# Altium PCB PCB_Indication.PcbDoc
Units mm, origin at the board's own origin, x right, y up, seen from the top; angles counter-clockwise.
Board outline 30 x 20 mm, 2 copper layers (Top Layer, Bottom Layer); 18 components, 60 nets, 63 pads, 0 vias.
Unrouted connection lines stored in the file: 5.
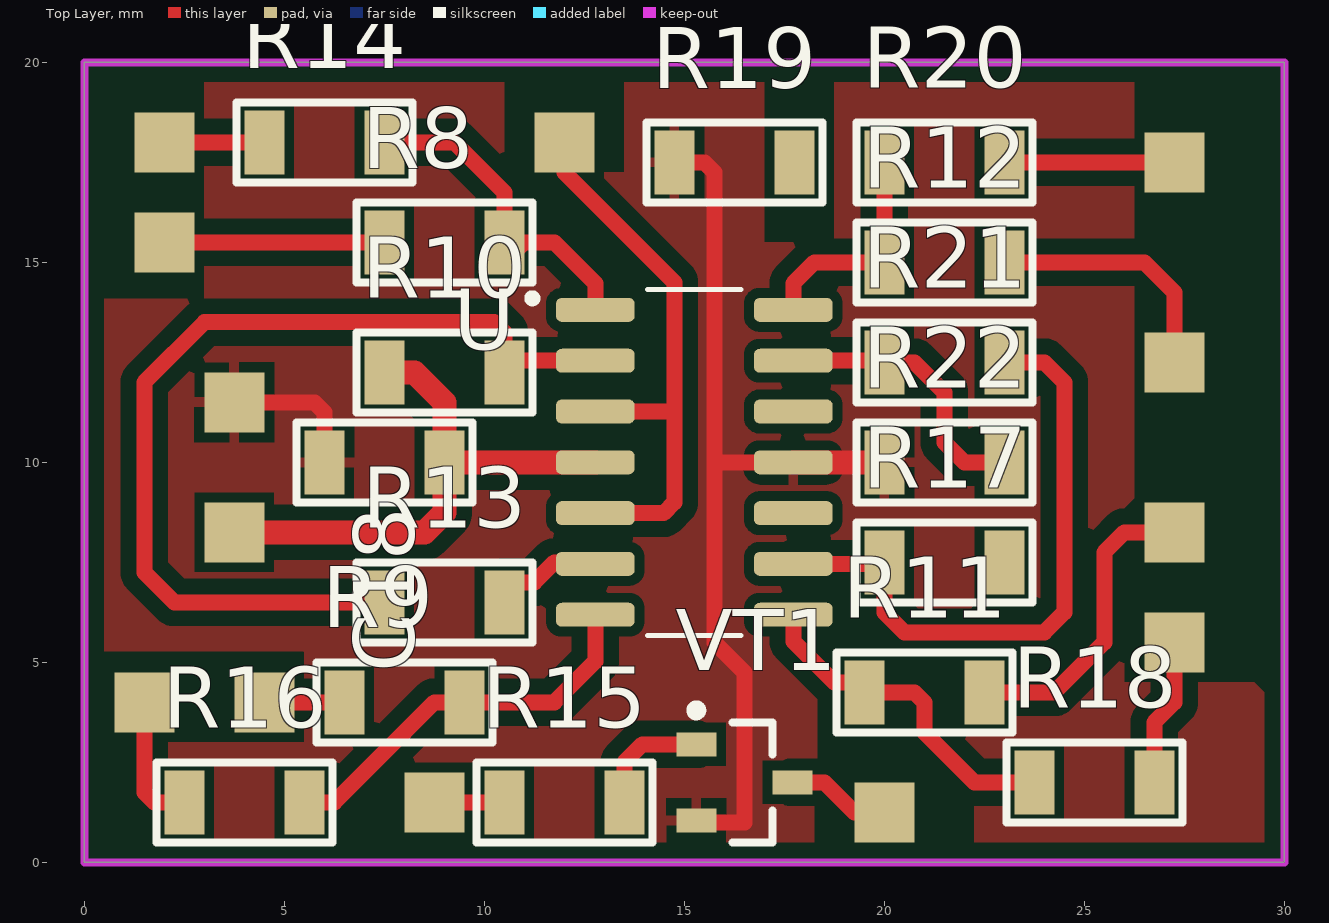
[diagram p0: Top Layer view]
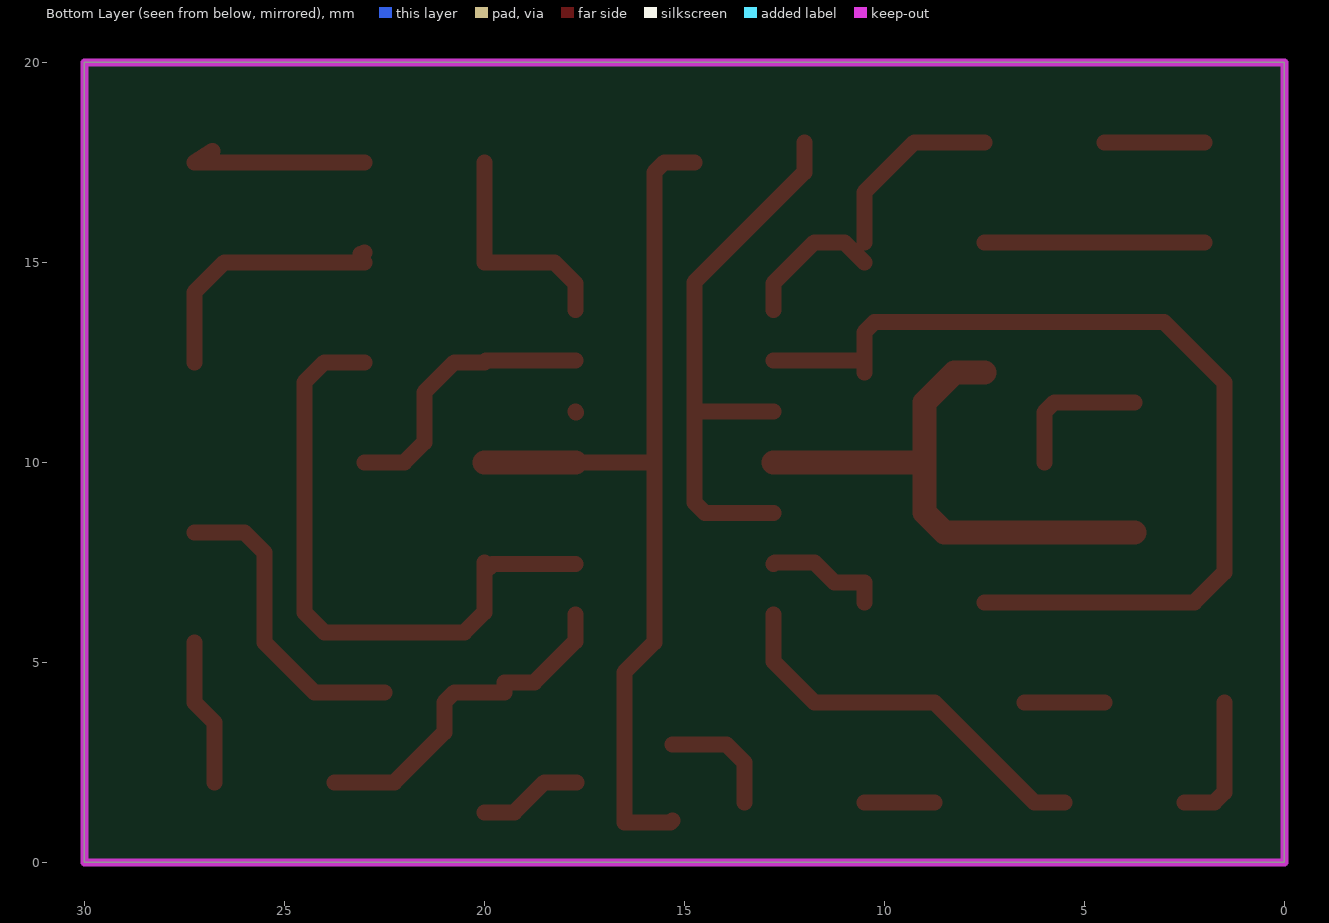
[diagram p1: Bottom Layer view, seen from below]
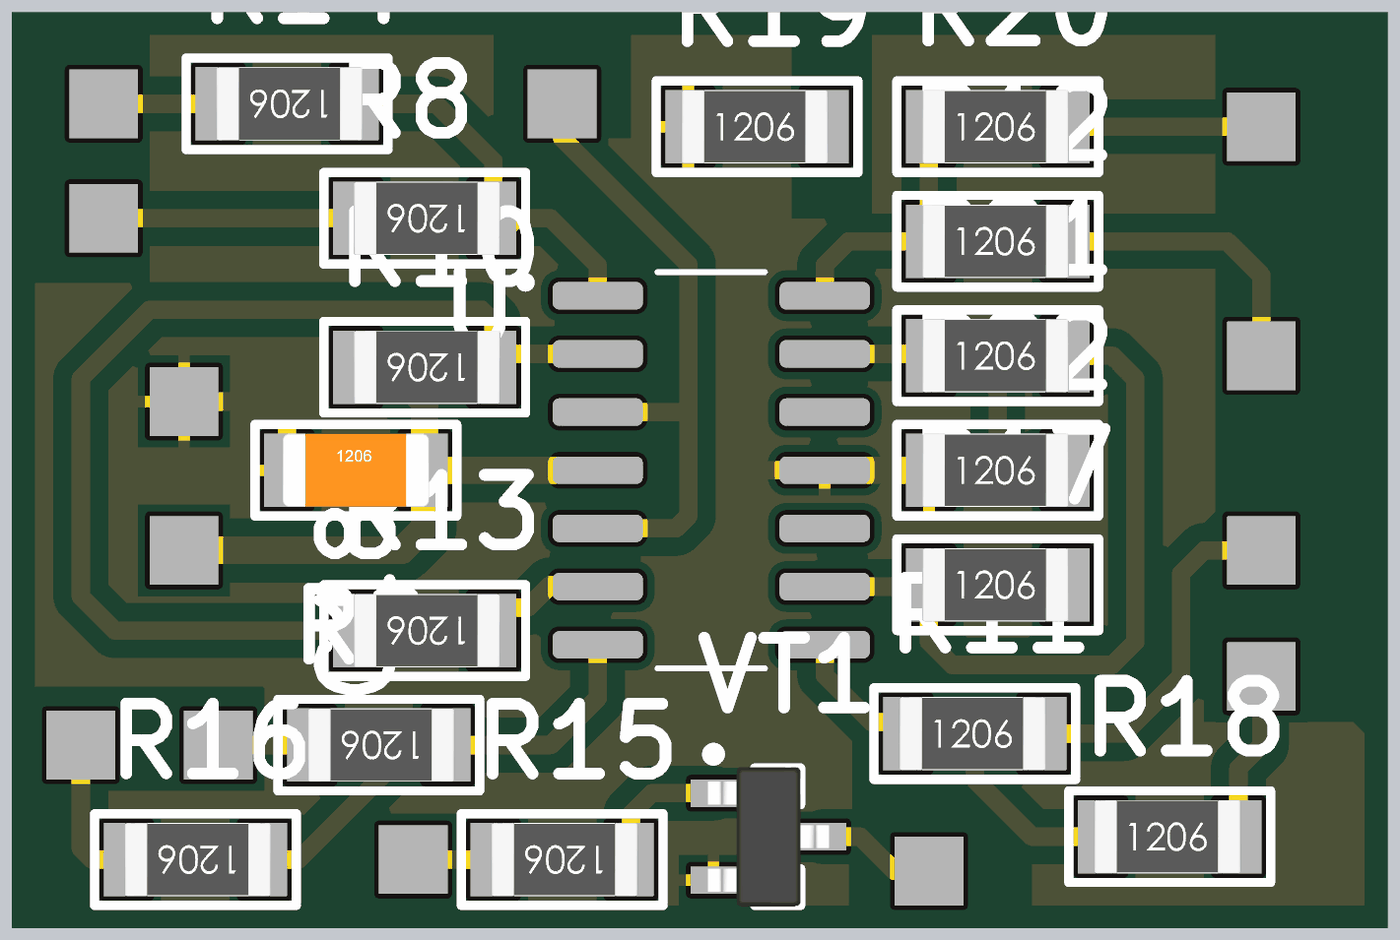
[diagram p2: 3D render of the assembled board from above, using the file's embedded part models]

## Layer stack, top to bottom
Top Solder: solder mask 0.0102, Solder Resist, Dk 3.5
Top Layer: signal copper 0.0356
Dielectric 1: dielectric 0.32, FR-4, Dk 4.8
Bottom Layer: signal copper 0.0356
Bottom Solder: solder mask 0.0102, Solder Resist, Dk 3.5

## Board outline
0,0 0,20 30,20 30,0

## Design rules (kind name [scope] priority, off if disabled: settings)
Clearance [All] p1: gap=0.254 ignorepadtopadclearanceinfootprint=TRUE except(0: Arc-Hole Track-Hole SMDPad-Hole THPad-Hole Via-Hole Fill-Hole Poly-Hole Region-Hole Text-Hole; 0.4: Arc-Fill Arc-Poly Arc-Region Track-Fill Track-Poly Track-Region)
PolygonConnect [All] p1: connectstyle=Relief reliefconductorwidth=0.254 reliefentries=4 polygonreliefangle="90 Angle" airgapwidth=0.254
RoutingVias [All] p1: holewidth=0.711 width=1.27 viastyle="Through Hole" minholewidth=0.711 minwidth=1.27 maxholewidth=0.711 maxwidth=1.27
SolderMaskExpansion [All] p1: expansion=0.102
Width [All] p1: maxlimit=0.8 minlimit=0.254 preferedwidth=0.4
30 further rules are at their usual default settings.

## Classes and differential pairs
component class SchemeP1: U5 U6 U12

## Components (designator, comment, footprint, x,y, rotation, side; value= is the part's Value field where it differs from the comment)
C18 "Ceramic capacitor, 0.1μF, X7R, ±10%, 50V, 1206, -55...+125°C" "CAP: 1206" 7.5,10 r0 top value=0.1?F
R8 "Resistor film, 3k, ±5%, 1206, 0.25W, -55...+125°C" "RES: 1206" 9,15.5 r180 top value=3k
R9 "Resistor film, 3k, ±5%, 1206, 0.25W, -55...+125°C" "RES: 1206" 8,4 r180 top value=3k
R10 "Resistor film, 10k, ±5%, 1206, 0.25W, -55...+125°C" "RES: 1206" 9,12.25 r180 top value=10k
R11 "Resistor film, 3k, ±5%, 1206, 0.25W, -55...+125°C" "RES: 1206" 21,4.25 r0 top value=3k
R12 "Resistor film, 3k, ±5%, 1206, 0.25W, -55...+125°C" "RES: 1206" 21.5,15 r0 top value=3k
R13 "Resistor film, 10k, ±5%, 1206, 0.25W, -55...+125°C" "RES: 1206" 9,6.5 r180 top value=10k
R14 "Resistor film, 3k, ±5%, 1206, 0.25W, -55...+125°C" "RES: 1206" 6,18 r180 top value=3k
R15 "Resistor film, 1k, ±5%, 1206, 0.25W, -55...+125°C" "RES: 1206" 12,1.5 r180 top value=1k
R16 "Resistor film, 3k, ±5%, 1206, 0.25W, -55...+125°C" "RES: 1206" 4,1.5 r180 top value=3k
R17 "Resistor film, 10k, ±5%, 1206, 0.25W, -55...+125°C" "RES: 1206" 21.5,7.5 r0 top value=10k
R18 "Resistor film, 3k, ±5%, 1206, 0.25W, -55...+125°C" "RES: 1206" 25.25,2 r0 top value=3k
R19 "Resistor film, 10k, ±5%, 1206, 0.25W, -55...+125°C" "RES: 1206" 16.25,17.5 r0 top value=10k
R20 "Resistor film, 3k, ±5%, 1206, 0.25W, -55...+125°C" "RES: 1206" 21.5,17.5 r0 top value=3k
R21 "Resistor film, 10k, ±5%, 1206, 0.25W, -55...+125°C" "RES: 1206" 21.5,12.5 r0 top value=10k
R22 "Resistor film, 10k, ±5%, 1206, 0.25W, -55...+125°C" "RES: 1206" 21.5,10 r0 top value=10k
U "LM324DR" SOIC127P600X175-14N 15.25,10 r0 top
VT1 "*" SOT23_123 16.5,2 r0 top

## Footprints (in the part's own frame and the unit in brackets; to place one, negate y for a bottom-side part, rotate by r counter-clockwise, add the part's x,y. Pads: shape width x height; smd on the part's side, far side on the other; paste and mask are expansions set on the pad)
"CAP: 1206" [mm]
  rect 1x1.6 smd: 1(-1.5,0) 2(1.5,0)
  silkscreen extent -2.2,-1 2.2,1, body extent -1.6,-0.8 1.6,0.8, height 1
"RES: 1206" [mm]
  rect 1x1.6 smd: 1(-1.5,0) 2(1.5,0)
  silkscreen extent -2.2,-1 2.2,1, body extent -1.65,-0.8 1.55,0.8, height 0.47
SOIC127P600X175-14N [mm]
  rrect50% 1.97x0.6 smd: 1(-2.475,3.81) 2(-2.475,2.54) 3(-2.475,1.27) 4(-2.475,0) 5(-2.475,-1.27) 6(-2.475,-2.54) 7(-2.475,-3.81) 8(2.475,-3.81) 9(2.475,-2.54) 10(2.475,-1.27) 11(2.475,0) 12(2.475,1.27) 13(2.475,2.54) 14(2.475,3.81)
  silkscreen extent -4.15,-4.33 1.17,4.33
SOT23_123 [mm] "SOT23, 3-Leads, Body 3,0x2,6mm (max), Pitch 0,95mm, IPC Medium Density"
  rect 1x0.6 smd: 1(-1.2,0.95) 2(1.2,0) 3(-1.2,-0.95)
  round 0.5 on Mech1: ""(-0.9,1.1)
  silkscreen extent -1.32,-1.5 0.7,1.92, body extent -1.32,-1.52 1.32,1.52, height 1.12

## Part data
C18: library part Ceramic_1206, Manufacturer=Yageo, Package=1206, PartNumber=CC1206KRX7R9BB104, Temperature=-55...+125°C, Tolerance=±10%, TypeCapacitor="Ceramic capacitor", TypeDielectric=X7R, ValueManufacturerPartNumber="Ceramic capacitor, 0.1?F, X7R, ±10%, 50V, 1206, -55...+125°C", Voltage=50V, HelpURL=https://www.digikey.com/product-detail/en/yageo/CC1206KRX7R9BB104/311-1179-1-ND/303089
R8 R9 R10 R11 R12 R13 R14 R15 R16 R17 R18 R19 R20 R21 R22: library part Resistor_1206, Manufacturer=Yageo, Package=1206, PartNumber=RC1206JR-07100RL, Power=0.25W, Temperature=-55...+125°C, Tolerance=±5%, TypeResistor="Resistor film", HelpURL=https://www.digikey.com/product-detail/en/yageo/RC1206JR-07100RL/311-100ERCT-ND/732153
  R8 R9 R11 R12 R14 R16 R18 R20: ValueManufacturerPartNumber="Resistor film, 3k, ±5%, 1206, 0.25W, -55...+125°C"
  R10 R13 R17 R19 R21 R22: ValueManufacturerPartNumber="Resistor film, 10k, ±5%, 1206, 0.25W, -55...+125°C"
  R15: ValueManufacturerPartNumber="Resistor film, 1k, ±5%, 1206, 0.25W, -55...+125°C"
U: "4-Channel industry standard operational amplifier 14-SOIC 0 to 70", Package="SOIC-14 Texas Instruments", Arrow_Electronics-Purchase-URL=https://snapeda.com/shop?store=Arrow+Electronics&id=1818, Availability=Good, DigiKey-Purchase-URL=https://snapeda.com/shop?store=DigiKey&id=1818, MF="Texas Instruments", Mouser-Purchase-URL=https://snapeda.com/shop?store=Mouser&id=1818, MP=LM324DR, Price=None, SnapEDA_Link=https://www.snapeda.com/parts/LM324DR/Texas%20Instruments/view-part/1818/?ref=snap, Texas_Instruments-Purchase-URL=https://snapeda.com/shop?store=Texas+Instruments&id=1818
VT1: library part NPN, "Bipolar"

## Free pads (board coordinates)
  rect 1.5x1.5 smd: 15(8.75,1.5) 16(12,18) 17(3.75,8.25) 18(3.75,11.5) 19(20,1.25) 20(2,18) 21(2,15.5) 22(4.5,4) 23(1.5,4) 24(27.25,8.25) 25(27.25,5.5) 26(27.25,17.5) 27(27.25,12.5)

## Nets (pads, with @x,y where several pads share a name; then routed paths per layer and width w, separated by ;. In a path a pad name is that pad's centre, name@x,y a point inside that pad or via, vN(x,y) a via of type N, cw(c..) or ccw(c..) an arc to the next point about the centre after c; other vN are vias at no path point)
1Hz_Wave: 
+3.3V: 
+5V: C18.2 pad.17 R10.2 U.4 | length 13.8
  Top Layer w0.6: pad.17 8.5,8.25 9,8.75 C18.2 ; R10.2 8.25,12.25 9,11.5 C18.2 ; U.4 C18.2
+VBUS_INPUT_USB: pad.15 R15.2 | length 1.7
  Top Layer w0.4: pad.15 R15.2
CS: 
GND: C18.1 pad.18 R19.1 R22.1 U.11 VT1.3 | length 26.7
  Top Layer w0.4: pad.18 5.75,11.5 6,11.25 C18.1 ; R19.1 15.5,17.5 15.75,17.25 15.75,10 ; VT1.3 15.35,1 16.5,1 16.5,4.75 15.75,5.5 15.75,10 ; U.11 15.75,10
  Top Layer w0.6: U.11 R22.1
I_IN: 
I_OUT: 
IN_SW: 
INPUT_SENS_PIN: 
MISO: 
MOSI: 
NetBT1_1: pad.16 U.3 U.5 U.10 U.12 | length 14.2
  Top Layer w0.4: pad.16 12,17.25 14.75,14.5 14.75,11.27 ; U.5 14.48,8.73 14.75,9 14.75,10.75 ; U.3 14.75,11.27 ; 14.75,10.79 14.75,11.27 ; U.12@17.705,11.25 U.12
NetBT1_2: 
NetC1_2: 
NetC2_2: 
NetC11_1: 
NetC15_1: 
NetR3_1: 
NetR4_1: 
NetR4_2: 
NetR8_1: R8.1 R14.1 U.1 | length 8.3
  Top Layer w0.4: R14.1 9.25,18 10.5,16.75 R8.1 ; R8.1@10.5,15 11,15.5 11.75,15.5 12.775,14.475 U.1
NetR8_2: 
NetR9_1: R9.1 R16.1 U.7 | length 9.9
  Top Layer w0.4: R16.1 6.25,1.5 8,3.25 8.75,4 R9.1 11.75,4 12.775,5.025 U.7
NetR9_2: 
NetR10_1: R10.1 R13.2 U.2 | length 24.1
  Top Layer w0.4: R13.2 2.25,6.5 1.5,7.25 1.5,12 3.004,13.504 10.246,13.504 10.5,13.25 R10.1 ; R10.1@10.5,12.5 10.54,12.54 U.2
NetR11_1: R11.1 R18.1 U.8 | length 8.5
  Top Layer w0.4: U.8 17.725,5.525 18.75,4.5 R11.1@19.5,4.5 ; R11.1 20.75,4.25 21,4 21,3.25 22.25,2 R18.1
NetR11_2: 
NetR12_1: R12.1 R20.1 U.14 | length 5.7
  Top Layer w0.4: U.14 17.725,14.475 18.25,15 R12.1 R20.1
NetR12_2: 
NetR13_1: R13.1 R17.2 U.6 | length 3
  Top Layer w0.4: R13.1 10.5,7 11.25,7 11.75,7.5 12.735,7.5 U.6
NetR14_2: 
NetR15_1: R15.1 R19.2 VT1.1 | length 3
  Top Layer w0.4: R15.1 13.5,2.5 13.95,2.95 VT1.1
NetR16_2: 
NetR17_1: R17.1 R21.2 U.9 | length 15.8
  Top Layer w0.4: U.9 19.79,7.46 R17.1@19.875,7.375 ; R17.1 20,6.25 20.5,5.75 24,5.75 24.5,6.25 24.5,12 24,12.5 R21.2
NetR18_2: 
NetR20_2: 
NetR21_1: R21.1 R22.2 U.13 | length 7.1
  Top Layer w0.4: U.13 19.96,12.54 R21.1 20.75,12.5 21.5,11.75 21.5,10.5 22,10 R22.2
NetSB1_1: 
NetSB1_2: 
NetU3_1: 
NetU7_1: 
OUT_SW: 
RESET: 
SCK: 
SCL: 
SCL_OLED: 
SDA: 
SDA_OLED: 
SW_BTN: 
Uin: 
VD1: pad.21 R8.2 | length 5.5
  Top Layer w0.4: pad.21 R8.2
VD2: pad.22 R9.2 | length 2
  Top Layer w0.4: pad.22 R9.2
VD3: pad.24 R11.2 | length 7.7
  Top Layer w0.4: R11.2 24.25,4.25 25.5,5.5 25.5,7.75 26,8.25 pad.24
VD4: pad.27 R12.2 | length 6.4
  Top Layer w0.4: R12.2 26.5,15 27.25,14.25 pad.27 ; R12.2@23,15.25 R12.2@23.091,15.211
VD5: pad.20 R14.2 | length 2.5
  Top Layer w0.4: pad.20 R14.2
VD6: pad.23 R16.2 | length 3.4
  Top Layer w0.4: pad.23 1.5,1.75 1.75,1.5 R16.2
VD7: pad.25 R18.2 | length 3.7
  Top Layer w0.4: R18.2 26.75,3.5 27.25,4 pad.25
VD8: pad.26 R20.2 | length 4.8
  Top Layer w0.4: R20.2 pad.26 pad.26@26.797,17.788
VD_cathode: pad.19 VT1.2 | length 2.6
  Top Layer w0.4: VT1.2 18.5,2 19.25,1.25 pad.19
pads on no net: VT1.

## Polygon pours and split planes (outlines as drawn)
GND on Top Layer "TL" (solid, pour order 0): 0,20 30,20 30,0 0,0

## Keep-outs
Keep-Out Layer:
  the board outline again, w0.2

## Other copper
Top Layer:
  pour cut-out: 3.004,19.746 3,19.75 2.749,19.499 0.501,19.499 0.501,16.946 0.551,16.996 3.004,16.996
  pour cut-out: 3.004,16.996 3.004,14.105 2.989,14.09 0.501,14.09
  pour cut-out: 0.501,16.983 0.501,14.09 3.004,16.593 3.004,17.008
  pour cut-out: 0.501,5.274 5.476,5.274 5.504,5.246 5.504,2.996 0.504,2.996 0.5,3
  pour cut-out: 18.25,2.5 18.325,2.575 18.325,4.075 19.973,4.075 22.25,1.798 22.25,0.25 18.5,0.25 18.25,0
  pour cut-out: 26.25,19.5 26.246,19.496 26.246,9.097 26,8.851 26,4.5 29.25,4.5 29.5,4.25 29.5,19.75
  pour cut-out: 10.5,17.25 10.5,19.75 13.5,19.75 13.5,17.25
  pour cut-out: 16.996,18.554 17,18.558 17,19.5 18.75,19.5 18.75,15.5 17,15.5